# EAGLE board openservo-v27 (EAGLE 5.00)
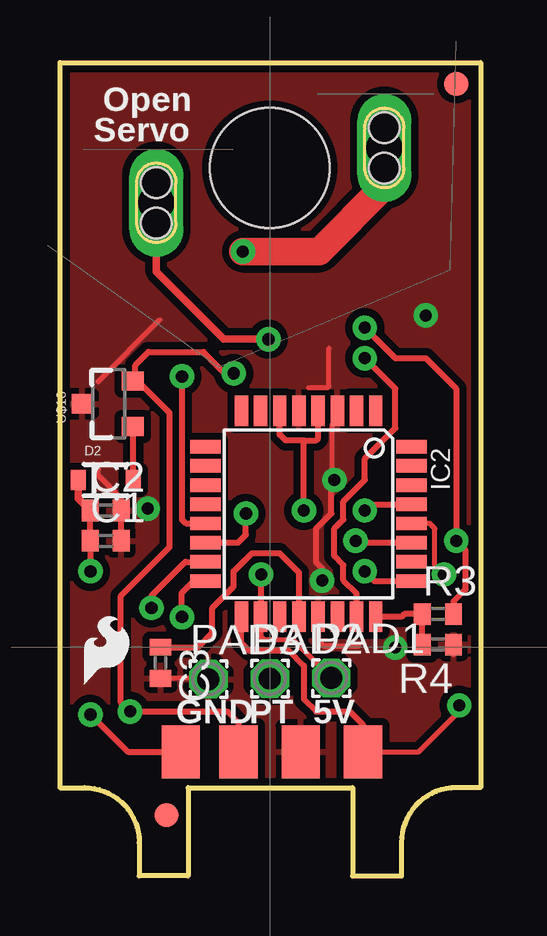
[diagram p0: board, top side]
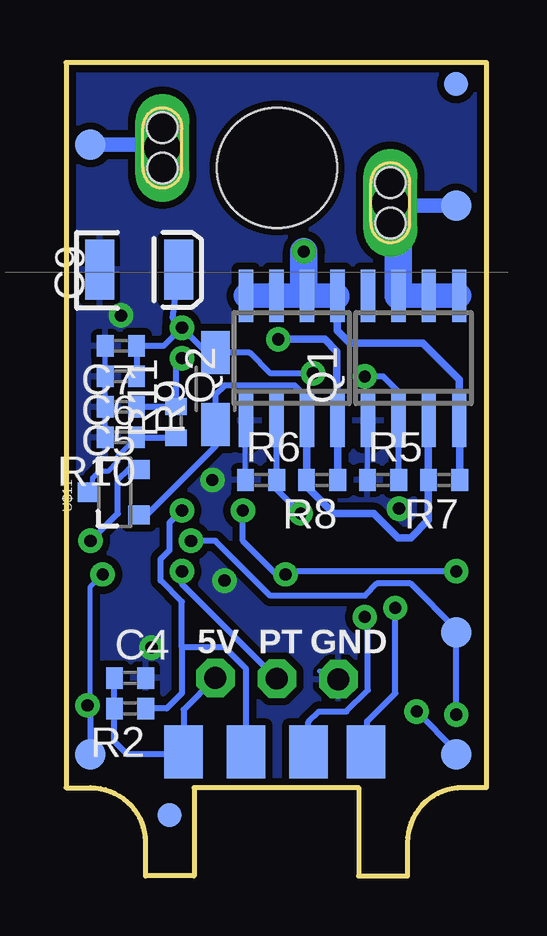
[diagram p1: board, bottom side, seen from below]

Size 17.53 x 33.91 mm. Coordinates in mm from the lower left corner, seen from the top.
Outline: 0,3.68 0,33.91 17.53,33.91 17.53,3.68 16.51,3.68 arc90 14.22,1.4 14.22,0 12.19,0 12.19,3.68 5.33,3.68 5.33,0 3.3,0 3.3,1.4 arc90 1.02,3.68 0,3.68
Copper layers (1*16): Top 0.035mm / dielectric 1.5mm / Bottom 0.035mm
Design rules "SparkFun": minimum track width 8mil, minimum drill 20mil, track to track 8mil, track to pad 8mil, pad to pad 8mil, via to via 8mil, smd to smd 8mil, copper to edge 10mil, drill to drill 8mil, minimum pad ring 12mil, minimum via ring 10mil, stop-mask expansion 4mil, vias tented up to drill 25mil, thermal gap 10mil
Holes 5 mm at 8.74,29.52
tKeepout: area 0.1,0 to 2.1,2; area 15.8,0 to 17.8,2; area 2.5,25.4 to 7.6,29.2; area 10.2,28.3 to 15.2,33
bKeepout: area 2.5,25.4 to 7.6,29.2; area 10.2,29.2 to 15.2,33

## Footprints (pad centres in the part's own frame; a part is rotated, then mirrored left to right if it is on the bottom)
C0402 = smd 0.7 x 0.9: 1 -0.65,0; 2 0.65,0
EIA3528 = smd 1.2 x 2.5: A 1.65,0; C -1.65,0
SOD-323 = smd 0.63 x 0.83: 1 -1.15,0; 2 1.15,0
TQFP32-08 = smd 1.27 x 0.559: 1 -4.293,2.8; 2 -4.293,2; 3 -4.293,1.2; 4 -4.293,0.4; 5 -4.293,-0.4; 6 -4.293,-1.2; 7 -4.293,-2; 8 -4.293,-2.8; 17 4.293,-2.8; 18 4.293,-2; 19 4.293,-1.2; 20 4.293,-0.4; 21 4.293,0.4; 22 4.293,1.2; 23 4.293,2; 24 4.293,2.8 | smd 0.559 x 1.27: 9 -2.8,-4.293; 10 -2,-4.293; 11 -1.2,-4.293; 12 -0.4,-4.293; 13 0.4,-4.293; 14 1.2,-4.293; 15 2,-4.293; 16 2.8,-4.293; 25 2.8,4.293; 26 2,4.293; 27 1.2,4.293; 28 0.4,4.293; 29 -0.4,4.293; 30 -1.2,4.293; 31 -2,4.293; 32 -2.8,4.293
1,6/0,9 = drill 0.914 pad 1.6 octagon: 1 0,0
SO8 = smd 0.6 x 2.2: 1 -1.905,-2.6; 2 -0.635,-2.6; 3 0.635,-2.6; 4 1.905,-2.6; 5 1.905,2.6; 6 0.635,2.6; 7 -0.635,2.6; 8 -1.905,2.6
R0402 = smd 0.7 x 0.9: 1 -0.65,0; 2 0.65,0
R1206W = smd 1.8 x 1.2: 1 -1.499,0; 2 1.499,0
PAD.03X.05 = smd 1.27 x 1.27: P$1 0,0
4-PIN-EDGE = smd 2.2 x 1.6: P$1 1.2,4.2; P$2 1.2,1.8; P$3 1.2,-0.8; P$4 1.2,-3.4
FIDUCIAL-1X2 = smd 1 x 1: 1 0,0
OPENSERVO_VIA = drill 1.5 long: P$1 0,0 | hole 1.27: -0.843,0.005; 0.843,0
SOT23-3 = smd 0.8 x 0.9: 1 -0.95,-1; 2 0.95,-1; 3 0,1.1

## Placement (x,y rotation side)
C1  0.1uF  [C0402]  1.91,13.97 0 top
C2  0.1uF  [C0402]  1.91,15.24 0 top
C3  0.1uF  [C0402]  4.19,8.89 270 top
C4  0.1uF  [C0402]  14.86,8.26 0 bottom
C5  0.1uF  [C0402]  15.24,19.56 180 bottom
C6  0.1uF  [C0402]  15.24,20.83 180 bottom
C7  1uF  [C0402]  15.24,22.1 180 bottom
C9  33uF  [EIA3528]  14.48,25.27 0 bottom
D2  [SOD-323]  1.91,16.51 0 top
IC2  ATMEGA168  [TQFP32-08]  10.35,15.1 270 top
PAD1  [1,6/0,9]  11.3,8.26 0 top
PAD2  [1,6/0,9]  8.75,8.23 0 top
PAD3  [1,6/0,9]  6.18,8.2 0 top
Q1  [SO8]  3.05,21.59 0 bottom
Q2  [SO8]  8.13,21.59 0 bottom
R2  4.7K  [R0402]  14.86,6.99 180 bottom
R3  4.7K  [R0402]  15.75,10.92 0 top
R4  2K  [R0402]  15.75,9.65 180 top
R5  100K  [R0402]  4.32,16.51 0 bottom
R6  100K  [R0402]  9.4,16.51 0 bottom
R7  100K  [R0402]  1.78,16.51 180 bottom
R8  100K  [R0402]  6.86,16.51 180 bottom
R9  0.1Ohm  [R1206W]  11.3,20.32 90 bottom
R10  1K  [R0402]  15.24,18.29 180 bottom
R11  1K  [R0402]  12.95,18.92 90 bottom
TP1  TEST-POINT3X5  [PAD.03X.05]  16.51,5.08 0 bottom
TP2  TEST-POINT3X5  [PAD.03X.05]  1.27,5.08 0 bottom
TP3  TEST-POINT3X5  [PAD.03X.05]  1.27,10.16 0 bottom
TP4  TEST-POINT3X5  [PAD.03X.05]  1.27,27.94 0 bottom
TP5  TEST-POINT3X5  [PAD.03X.05]  16.51,30.48 0 bottom
U$1  4-EDGEVERSION2  [4-PIN-EDGE]  9.23,3.98 90 top
U$2  4-EDGEVERSION2  [4-PIN-EDGE]  9.23,6.38 270 bottom
U$3  FIDUCIAL1X2  [FIDUCIAL-1X2]  4.45,2.54 0 top
U$4  FIDUCIAL1X2  [FIDUCIAL-1X2]  16.51,33.02 0 top
U$5  FIDUCIAL1X2  [FIDUCIAL-1X2]  1.27,33.02 0 bottom
U$6  FIDUCIAL1X2  [FIDUCIAL-1X2]  13.21,2.54 0 bottom
U$7  LOGO-SFESK  [SFE-LOGO-FLAME]  1.02,8 0 top
U$8  OPENSERVO_VIA  [OPENSERVO_VIA]  4.01,28.07 90 top
U$9  OPENSERVO_VIA  [OPENSERVO_VIA]  13.51,30.35 90 top
U$10  LM3480IM4  [SOT23-3]  2.03,19.68 90 top
U$11  ZCT1009FTA  [SOT23-3]  15.49,16 90 bottom
U$12  [CREATIVE_COMMONS]  -25.4,38.1 0 top  (outside the outline)

## Library data of the parts
C1-C7 R2-R8 R10 R11 = rcl
C9 D2 IC2 TP1-TP5 U$3-U$12 = SparkFun
PAD1-PAD3 = wirepad
Q1 Q2 = zetex
R9 U$1 U$2 = openservo

## Nets
+5V: C1.1 C2.1 C4.1 D2.1 IC2.4 IC2.6 IC2.18 PAD1.1 R2.2 U$2.P$4
CURSENSE: C5.1 IC2.23 R11.2
GND: C1.2 C2.2 C3.2 C4.2 C5.2 C6.2 C7.2 C9.C IC2.3 IC2.5 IC2.21 PAD3.1 Q1.1 Q2.1 R4.1 R5.1 R6.1 R10.2 U$1.P$3 U$10.3
MISO: IC2.16 U$2.P$2
MOSI: IC2.15 U$2.P$1
N$1: D2.2 U$10.1
N$4: Q1.4 Q2.5 Q2.6 Q2.7 Q2.8 R7.1 TP5.P$1 U$9.P$1
N$5: Q1.5 Q1.6 Q1.7 Q2.4 R8.1 TP4.P$1 U$8.P$1
N$10: Q1.3 Q2.3 R7.2 R8.2 R9.1 U$11.1
N$12: R10.1 R11.1 U$11.3
N$21: C3.1 IC2.20
POT: IC2.25 PAD2.1
Q1AG: IC2.13 Q1.2 R5.2
Q2AG: IC2.14 Q2.2 R6.2
RESET: IC2.29 R2.1 U$2.P$3
SCK/SCL: IC2.17 IC2.28 TP1.P$1 U$1.P$4
SDA: IC2.27 TP3.P$1 U$1.P$1
VCC/2: C6.1 C7.1 C9.A R3.2 R9.2 TP2.P$1 U$1.P$2 U$10.2 U$11.2
VOLTSENSE: IC2.24 R3.1 R4.2

## Tracks (layer width: path | path; a pad name or v marks a point on that pad's centre or on a via)
+5V  (via drill 0.51)
  Top 0.203: IC2.18 8.36,9.98 8.48,9.86 9.7,9.86 PAD1.1
  Top 0.254: C2.1 1.25,14.11 1.27,14.1 1.25,14.08 C1.1 1.25,12.71 v1.27,12.7 | IC2.18 8.36,12.55 v8.38,12.57 | IC2.6 9.15,18.4 9.4,18.16 10.16,18.16 | v10.16,15.24 10.16,18.16 | IC2.4 10.76,18.25 10.67,18.16 10.16,18.16
  Top 0.305: D2.1 0.76,15.74 C2.1
  Bottom 0.254: C4.1 15.62,8.26 15.51,8.14 R2.2 15.51,5.6 14.99,5.08 12.7,5.08 12.6,5.18 | 12.6,5.18 12.57,5.21 | 12.6,5.18 U$2.P$4 12.63,6.93 PAD1.1 | v1.27,12.7 8.26,12.7 v8.38,12.57 8.76,12.57 10.16,13.97 v10.16,15.24
CURSENSE  (via drill 0.51)
  Top 0.254: v12.7,21.59 13.97,20.32 13.97,18.67 12.7,17.4 12.7,16.51 11.81,15.62 11.81,14.86 11.43,14.48 11.43,13.34 11.81,12.95 11.81,12.32 12.36,11.78 IC2.23
  Bottom 0.254: v12.7,21.59 12.95,21.34 R11.2 12.97,19.56 C5.1
GND  (via drill 0.51)
  Top 0.203: C3.2 4.62,8.26 5.38,8.26 PAD3.1 | 10.36,20.34 11.15,20.34 11.2,20.42 11.2,22 | 11.4,9.6 12.45,9.6 | 11.35,16.51 11.35,18.77 IC2.3 | 1.57,20.6 4.17,23.19
  Top 0.254: 2.54,15.24 C2.2 | C1.2 2.56,15.22 2.54,15.24 | R4.1 16.4,9.26 | 1.57,16.97 1.57,16.71 2.54,15.75 2.54,15.24 | v10.92,12.32 10.92,12.83 10.67,13.08 10.67,14.48 11.3,15.11 11.3,16.38 v11.43,16.51 | 11.4,9.6 10.97,9.6 10.76,9.82 IC2.21
  Top 0.305: 2.54,15.24 2.54,15.26
  Bottom 0.203: R10.2 15.9,18.72 15.9,19.13 C5.2 15.9,19.99 15.9,20.4 C6.2 15.9,21.26 15.9,21.67 C7.2 | Q1.1 4.95,16.94 R5.1 | R6.1 10.06,16.94 10.06,17.91 Q2.1 | C4.2 14.12,8.43 | PAD3.1 6.96,8.53 | C9.C 16,25.27
  other vias: 3.66,15.32 15.24,23.37 13.97,9.53
  pour Bottom (isolate 0.305): 0,33.91 0,3.68 17.53,3.68 17.53,33.88
  pour Top (isolate 0.305): 0,33.91 0,3.68 17.53,3.68 17.5,33.91
MISO  (via drill 0.51)
  Top 0.254: IC2.16 5.57,12.3 5.08,11.81 v5.08,10.79
  Bottom 0.254: U$2.P$2 7.43,6.42 6.99,6.86 5.84,6.86 4.95,7.75 4.95,10.67 v5.08,10.79
MOSI  (via drill 0.51)
  Top 0.254: IC2.15 5.22,13.1 3.81,11.68 v3.81,11.18
  Bottom 0.254: U$2.P$1 4.98,5.18 4.98,6.45 3.81,7.62 v3.81,11.18
N$1
  Top 0.254: U$10.1 3.11,18.73 3.17,18.67 3.06,18.55 D2.2
N$4  (via drill 0.51)
  Top 1.143: U$9.P$1 13.51,28.75 10.79,26.04 v7.62,26.04
  Bottom 0.254: Q1.4 1.14,19.05 1.13,19.04
  Bottom 0.305: R7.1 1.13,19.04 | 1.14,19.05 1.14,20.7 2.67,22.23 5.71,22.23 6.22,22.73 Q2.5
  Bottom 0.61: U$9.P$1 13.64,30.48 TP5.P$1
  Bottom 1.016: Q2.8 8.96,24.19 8.89,24.26 8.82,24.19 Q2.7 7.81,24.19 | Q2.6 7.49,24.13 7.55,24.19 7.81,24.19 | Q2.5 6.22,24.13 6.28,24.19 Q2.6 | Q2.6 7.81,24.19
  Bottom 1.143: v7.62,26.04 7.62,24.32 Q2.6
N$5  (via drill 0.51)
  Top 0.305: v8.69,22.38 6.83,22.38 4.45,24.77 | 4.45,24.77 4.19,25.02 | U$8.P$1 4.01,25.2 4.45,24.77
  Bottom 0.254: Q2.4 6.22,18.8 6.21,18.78
  Bottom 0.305: R8.1 6.21,18.78 | Q2.4 6.25,20.07 6.25,21.87 6.76,22.38 v8.69,22.38
  Bottom 0.61: U$8.P$1 3.89,27.94 TP4.P$1
  Bottom 1.016: Q1.5 2.35,24.19 2.41,24.13 Q1.6 3.62,24.19 3.68,24.13 Q1.7
  Bottom 1.143: Q1.7 3.68,27.74 U$8.P$1
N$10
  Bottom 0.203: 14.26,14.9 14.22,14.86 | 14.26,14.95 14.26,14.9 | U$11.1 14.42,15.05 14.26,14.9
  Bottom 0.254: R9.1 11.3,18.92 | Q1.3 2.41,18.92 2.43,18.91 | 7.51,18.91 7.49,18.92 Q2.3 7.49,19.94 8,20.45 10.92,20.45 11.3,20.07 R9.1 | R9.1 11.3,17.91 14.26,14.95
  Bottom 0.305: 2.43,18.91 R7.2 2.43,14.84 3.17,14.1 3.68,14.1 4.7,15.11 6.38,15.11 7.51,16.25 R8.2 7.51,18.91
N$12
  Bottom 0.203: R10.1 15.37,17.51 15.37,17.27 15.75,16.89 16.13,16.89 16.42,16.6 16.42,16.09 16.51,16 U$11.3
  Bottom 0.254: 14.59,18.18 R10.1 12.95,18.29 R11.1
N$21
  Top 0.254: C3.1 5.73,9.54 6.35,10.16 6.35,11.18 7.24,12.06 7.24,12.7 8,13.46 9.14,13.46 9.96,12.65 IC2.20
POT  (via drill 0.51)
  Top 0.254: IC2.25 13.1,12.3 v12.7,12.7
  Bottom 0.254: v12.7,12.7 12.7,12.18 PAD2.1
Q1AG  (via drill 0.51)
  Top 0.254: IC2.13 5.24,14.7 5.08,14.86 v5.08,20.83
  Bottom 0.254: R5.2 3.67,18.91 3.68,18.92 Q1.2 3.68,20.19 4.32,20.83 v5.08,20.83
Q2AG  (via drill 0.51)
  Top 0.254: IC2.14 7.42,13.9 7.75,14.22 v7.75,15.11
  Bottom 0.254: Q2.2 8.76,18.92 8.64,18.8 8.75,18.68 R6.2 8.75,16.11 v7.75,15.11
RESET  (via drill 0.51)
  Top 0.254: IC2.29 12.96,15.5 v12.7,15.24
  Bottom 0.254: R2.1 13.34,6.99 12.7,7.62 12.7,9.53 | U$2.P$3 10.03,8.63 10.92,9.53 12.7,9.53 | 12.7,9.53 12.7,11.43 13.59,12.32 13.59,13.21 13.21,13.59 13.21,14.73 v12.7,15.24
SCK/SCL  (via drill 0.51)
  Top 0.203: IC2.28 15.4,14.7 15.62,14.48 15.62,12.95 v16,12.57 | U$1.P$4 14.96,5.18 16.64,6.86 v16.64,7.11
  Top 0.254: U$1.P$4 12.63,6.29 12.06,6.86 10.67,6.86 10.16,7.37 10.16,8.76 9.53,9.4 7.87,9.4 7.55,9.72 IC2.17
  Bottom 0.203: v16,12.57 16.51,12.06 16.51,7.24 v16.64,7.11
  Bottom 0.254: v16.64,7.11 16.51,6.86 | 16.51,7.24 TP1.P$1
SDA  (via drill 0.51)
  Top 0.254: IC2.27 12.39,13.9 v12.32,13.97 | U$1.P$1 2.82,5.18 v1.27,6.73
  Bottom 0.254: v12.32,13.97 11.3,13.97 9.02,11.68 5.08,11.68 4.57,12.19 3.17,12.19 1.27,10.29 TP3.P$1 v1.27,6.73 1.27,6.6
VCC/2  (via drill 0.51)
  Top 0.254: U$1.P$2 7.43,6.41 6.99,6.86 v2.92,6.86 2.54,7.24 2.54,11.68 4.57,13.72 4.57,19.3 3.17,20.7 3.11,20.64 U$10.2 2.98,20.64 | v12.7,22.86 13.97,21.59 15.24,21.59 16.51,20.32 v16.51,13.97 16.89,13.59 16.89,11.94 16.4,11.45 R3.2 | v7.24,20.95 6.86,20.95 5.97,21.84 3.68,21.84 3.14,21.3 3.14,20.79 2.98,20.64 | 2.98,20.64 2.92,20.57
  Bottom 0.203: 14.49,17 14.48,17.02 | 14.49,17 U$11.2 | 14.92,16.95 14.54,16.95 14.49,17
  Bottom 0.254: 14.92,16.95 15.37,16.51 15.37,15.11 v16.51,13.97 | v12.7,22.86 11.66,21.82 R9.2 9.88,21.82 9.02,20.95 v7.24,20.95 | C9.A 13.08,23.24 v12.7,22.86 | C6.1 C7.1 13.46,22.1 v12.7,22.86 | TP2.P$1 1.27,5.21 v2.92,6.86
VOLTSENSE
  Top 0.254: IC2.24 14.23,10.8 14.35,10.92 R3.1 R4.2

## Text on the board
tPlace: Open | Servo | GND | PT | 5V
bPlace: GND | PT | 5V
tNames: SparkFun Electronics